# Altium PCB PCB1.PcbDoc
Units mil, origin at the board's own origin, x right, y up, seen from the top; angles counter-clockwise.
Board outline 3705 x 1620 mil, 2 copper layers (Top Layer, Bottom Layer); 43 components, 32 nets, 138 pads, 127 vias.
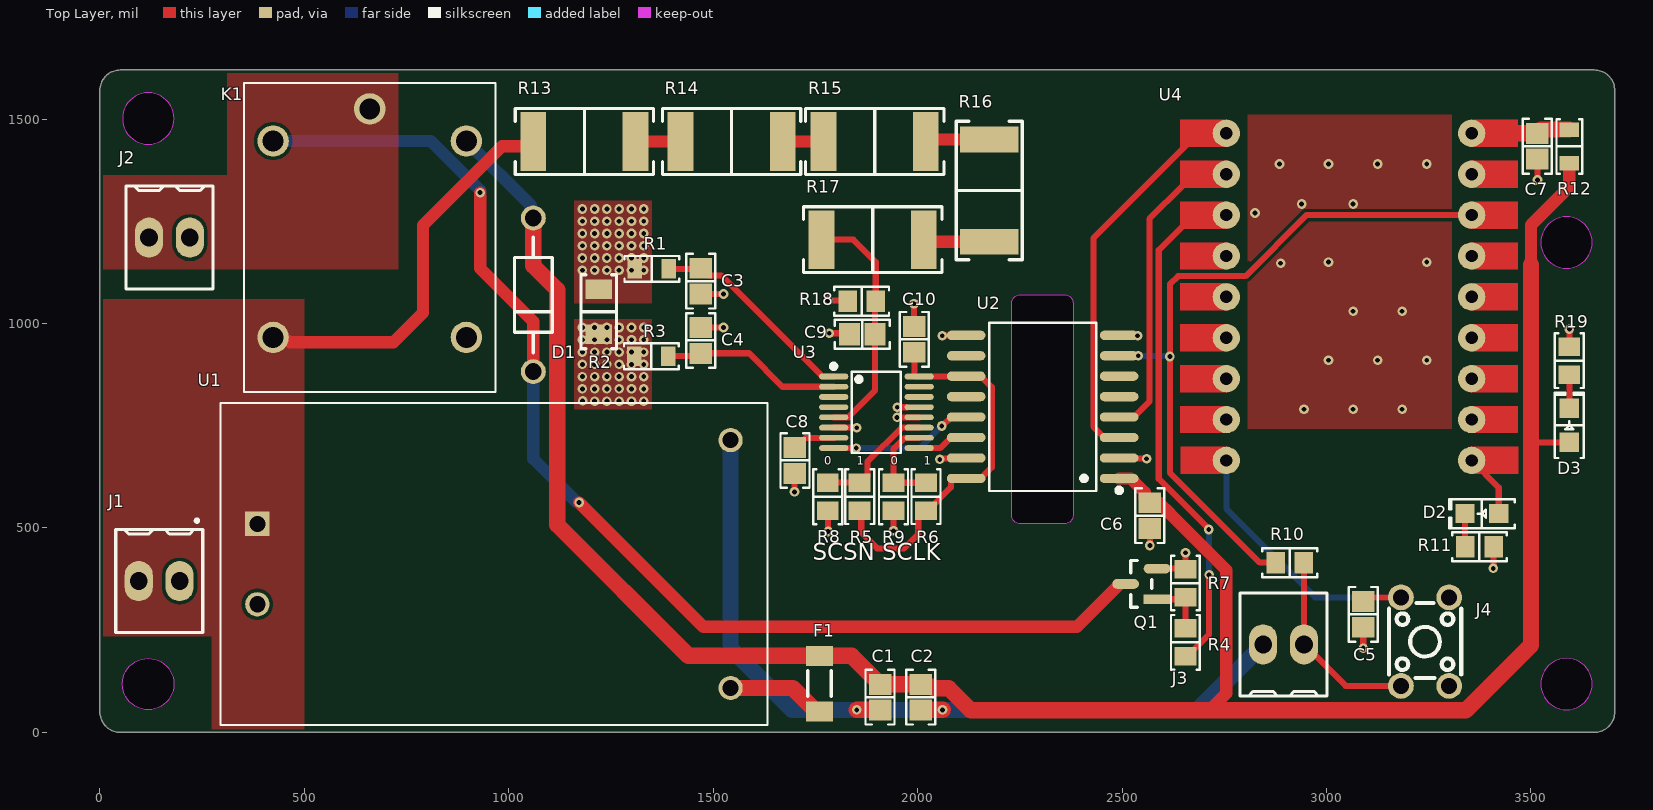
[diagram p0: Top Layer view]
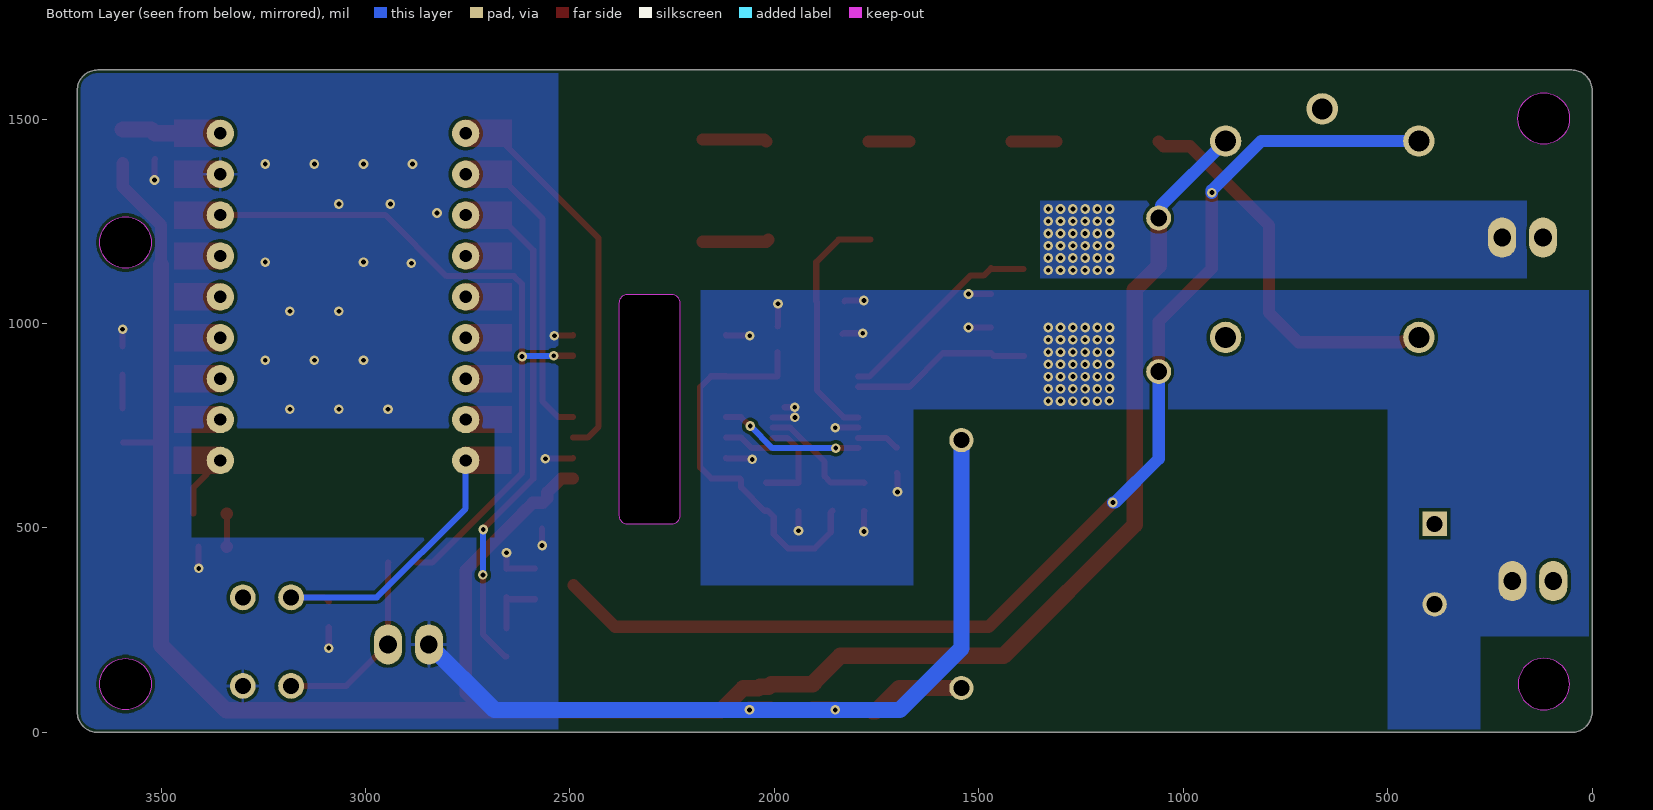
[diagram p1: Bottom Layer view, seen from below]
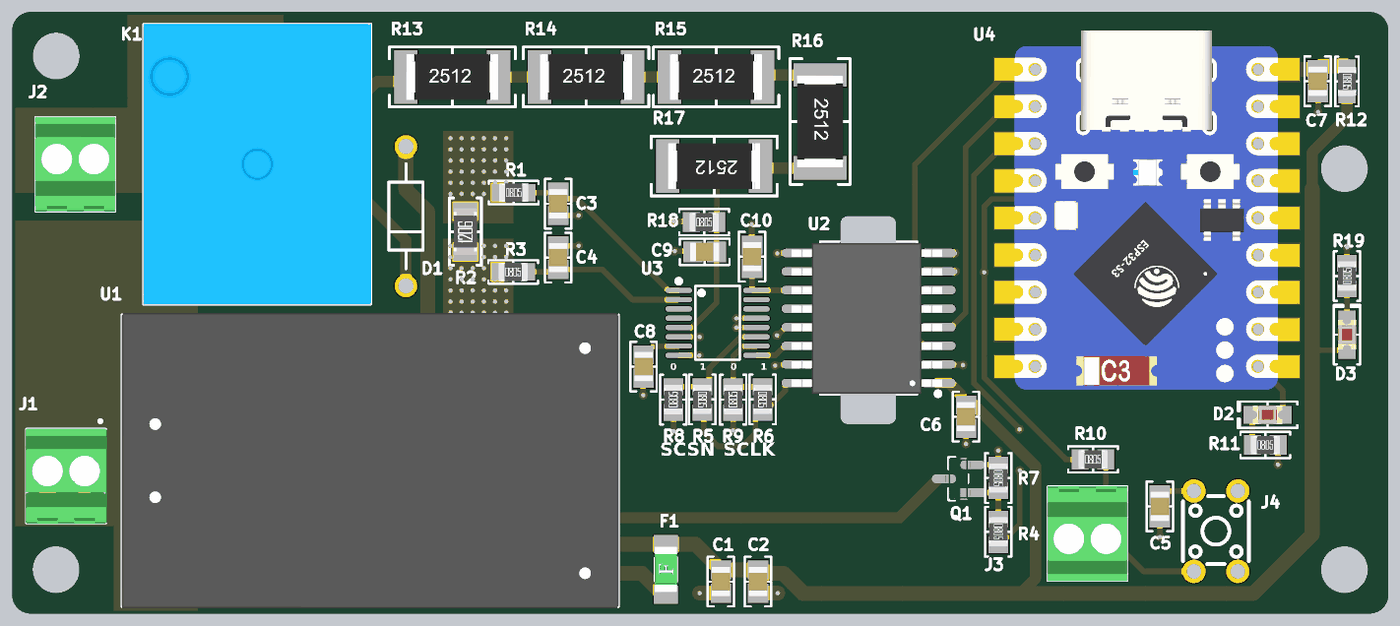
[diagram p2: 3D render of the assembled board from above, using the file's embedded part models]

## Layer stack, top to bottom
Top Solder: solder mask 0.4, Solder Resist, Dk 3.5
Top Layer: signal copper 1.4
Dielectric 1: dielectric 12.6, FR-4, Dk 4.8
Bottom Layer: signal copper 1.4
Bottom Solder: solder mask 0.4, Solder Resist, Dk 3.5

## Board outline
50,0 cw(c50,50) 0,50 0,1570 cw(c50,1570) 50,1620 3655,1620 cw(c3655,1570) 3705,1570 3705,50 cw(c3655,50) 3655,0 115,0
cut-out: 3523.9,1198 ccw(c3586.89,1198) 3586.89,1135.01 ccw(c3586.89,1198) 3649.88,1198 ccw(c3586.89,1198) 3586.89,1260.99 ccw(c3586.89,1198)
cut-out: 118.31,1438.29 ccw(c118.31,1501.28) 181.3,1501.28 ccw(c118.31,1501.28) 118.31,1564.27 ccw(c118.31,1501.28) 55.31,1501.28 ccw(c118.31,1501.28)
cut-out: 2230,530 2230,1050 cw(c2250,1050) 2250,1070 2360,1070 cw(c2360,1050) 2380,1050 2380,530 cw(c2360,530) 2360,510 2250,510 cw(c2250,530)
cut-out: 3523.9,118.11 ccw(c3586.89,118.11) 3586.89,55.12 ccw(c3586.89,118.11) 3649.88,118.11 ccw(c3586.89,118.11) 3586.89,181.1 ccw(c3586.89,118.11)
cut-out: 118.11,55.12 cw(c118.11,118.11) 55.12,118.11 cw(c118.11,118.11) 118.11,181.1 cw(c118.11,118.11) 181.1,118.11 cw(c118.11,118.11)

## Design rules (kind name [scope] priority, off if disabled: settings)
BoardOutlineClearance [All] p1: gap=7.87 ignorepadtopadclearanceinfootprint=FALSE
Clearance [All] p1: gap=8 ignorepadtopadclearanceinfootprint=FALSE except(9.84: Arc-Hole Track-Hole SMDPad-Hole THPad-Hole Via-Hole Fill-Hole Poly-Hole Region-Hole Text-Hole)
ComponentClearance [All] p1: gap=5 collisioncheckmode=3 verticalgap=5 showdistances=TRUE
DiffPairsRouting [All] p1: maxlimit=15 minlimit=8 mostfreqgap=8 toplayer_minwidth=8 toplayer_maxwidth=1000 toplayer_prefwidth=8 bottomlayer_minwidth=8 bottomlayer_maxwidth=1000 bottomlayer_prefwidth=8 maxuncoupledlength=500
Height [All] p1: minheight=0 maxheight=71497.94 prefheight=500
HoleSize [All] p1: absolutevalues=TRUE maxlimit=248.03 minlimit=11.81 maxpercent=80.000 minpercent=20.000
HoleToHoleClearance [All] p1: gap=9.84 allowstackedmicrovias=FALSE
MinimumAnnularRing [All] p1: minimumring=3
MinimumSolderMaskSliver [All] p1: minsoldermaskwidth=0
PlaneClearance [All] p1: clearance=8
PlaneConnect PlaneConnectPowerPads [InPadClass('PowerPads')] p1: planeconnectstyle=Direct reliefexpansion=20 reliefentries=4 reliefconductorwidth=10 reliefairgap=10
PlaneConnect [All] p2: pad.planeconnectstyle=Relief pad.reliefexpansion=11.81 pad.reliefentries=4 pad.reliefconductorwidth=8 pad.reliefairgap=8 via.planeconnectstyle=Direct via.reliefexpansion=11.81 via.reliefentries=4 via.reliefconductorwidth=5 via.reliefairgap=5
PolygonConnect PolygonConnectPowerPads [All vs (InPadClass('PowerPads'))] p1: connectstyle=Direct reliefconductorwidth=10 reliefentries=4 polygonreliefangle="90 Angle" airgapwidth=10
PolygonConnect [All] p2: thpad.connectstyle=Relief thpad.reliefconductorwidth=8 thpad.reliefentries=4 thpad.polygonreliefangle="90 Angle" thpad.airgapwidth=8 smdpad.connectstyle=Relief smdpad.reliefconductorwidth=8 smdpad.reliefentries=4 smdpad.polygonreliefangle="90 Angle" smdpad.airgapwidth=8 via.connectstyle=Direct via.reliefconductorwidth=5 via.reliefentries=4 via.polygonreliefangle="90 Angle" via.airgapwidth=5
RoutingVias [All] p1: holewidth=11.81 width=23.62 viastyle="Through Hole" minholewidth=11.81 minwidth=23.62 maxholewidth=23.62 maxwidth=259.84
SilkToSilkClearance [All] p1: silktosilkclearance=0
SilkToSolderMaskClearance [IsPad] p1: minsilkscreentomaskgap=5 clearancetoexposedcopper=TRUE
SolderMaskExpansion [All] p1: expansion=2.95 istentingtop=FALSE
SupplyNets "Schematic Supply Nets_6" [InNet('3V3')] p1: voltage=0.000
SupplyNets "Schematic Supply Nets_5" [InNet('OUT2')] p2: voltage=0.000
SupplyNets "Schematic Supply Nets_4" [InNet('GND')] p3: voltage=0.000
SupplyNets "Schematic Supply Nets_3" [InNet('+5')] p4: voltage=0.000
SupplyNets "Schematic Supply Nets_2" [InNet('PGND')] p5: voltage=0.000
SupplyNets "Schematic Supply Nets_1" [InNet('AC1')] p6: voltage=0.000
SupplyNets "Schematic Supply Nets" [InNet('OUT1')] p7: voltage=0.000
Width [All] p1: maxlimit=1000 minlimit=8 preferedwidth=8 minimp=50.000000 maximp=50.000000 favimp=50.000000
20 further rules are at their usual default settings.

## Components (designator, comment, footprint, x,y, rotation, side; value= is the part's Value field where it differs from the comment)
C1 "10 µF" "CAP 0805_2012" 1908,86 r270 top
C2 "10 µF" "CAP 0805_2012" 2008,86 r270 top
C3 "0.033 µF" "CAP 0805_2012" 1470,1103.5 r90 top
C4 "0.033 µF" "CAP 0805_2012" 1470,958.5 r90 top
C5 "10 µF" "CAP 0805_2012" 3090,288.5 r270 top
C6 "0.1 µF" "CAP 0805_2012" 2568,530 r270 top
C7 "0.1 µF" "CAP 0805_2012" 3515,1433.5 r270 top
C8 "0.1 µF" "CAP 0805_2012" 1700,665 r90 top
C9 "0.033 µF" "CAP 0805_2012" 1864.5,974 r0 top
C10 "0.1 µF" "CAP 0805_2012" 1992,961 r90 top
D1 "CMP-0902-00115-1" CMP-0902-00115-1 1060,1070 r90 top
D2 "Red" "LED 0805_2012 RED" 3380,535 r180 top
D3 "Red" "LED 0805_2012 RED" 3594,751 r90 top
F1 "04661.25NR" "FUSE 1206_3216 0.6MM" 1760,119 r90 top
J1 "282834-2" "TE 282834-2" 145,370 r0 top
J2 "282834-2" "TE 282834-2" 170,1210 r0 top
J3 "282834-2" "TE 282834-2" 2895,215 r180 top
J4 "Tactile switch" "Tactive switch" 3240.94,221.73 r90 top
K1 "CMP-003-000000-1" CMP-003-000000-1 660,1210 r270 top
Q1 "P2N2222AG" FP-SOT23-IPC_A 2547,363 r180 top
R1 "100 Ohms" "YAGEO RES 0805_2012" 1350,1133.5 r0 top
R2 "1 mOhms" "RES 1206_3216" 1220,1028.5 r90 top
R3 "100 Ohms" "YAGEO RES 0805_2012" 1348.66,920 r0 top
R4 "1 kOhms" "RES 0805_2012" 2655,220 r270 top
R5 "1 kOhms" "RES 0805_2012" 1858,576.45 r270 top
R6 "1 kOhms" "RES 0805_2012" 2020.43,576.44 r270 top
R7 "1 kOhms" "RES 0805_2012" 2655,365 r270 top
R8 "1 kOhms" "RES 0805_2012" 1780,576 r90 top
R9 "1 kOhms" "RES 0805_2012" 1941,576 r90 top
R10 "1 kOhms" "RES 0805_2012" 2910,415 r0 top
R11 "1 kOhms" "RES 0805_2012" 3374,454 r0 top
R12 "100 Ohms" "YAGEO RES 0805_2012" 3594,1433 r270 top
R13 "200 kOhms" "RES 2512_6432" 1185,1445 r0 top
R14 "200 kOhms" "RES 2512_6432" 1545,1445 r0 top
R15 "200 kOhms" "RES 2512_6432" 1895,1445 r0 top
R16 "200 kOhms" "RES 2512_6432" 2175,1325 r270 top
R17 "200 kOhms" "RES 2512_6432" 1890,1205 r180 top
R18 "1 kOhms" "RES 0805_2012" 1863,1054 r0 top
R19 "1 kOhms" "RES 0805_2012" 3594,909 r90 top
U1 "HLK-PM01" HLK-PM01 964.74,411.58 r0 top
U2 "CA-IS3621LVW" CA-IS3621LVW 2305,795 r90 top
U3 "HLW8112" HLW8112 1900,785 r270 top
U4 "ESP32 S3 SuperMini" "ESP32 S3 SUPERMINI" 3409.33,1527.6 r0 top

## Footprints (in the part's own frame and the unit in brackets; to place one, negate y for a bottom-side part, rotate by r counter-clockwise, add the part's x,y. Pads: shape width x height; smd on the part's side, far side on the other; paste and mask are expansions set on the pad)
CA-IS3621LVW [mil]
  oval 22.6x94.51 smd paste+0 mask+2: 1(-173.98,-187.75) 2(-123.98,-187.75) 3(-73.98,-187.75) 4(-23.98,-187.75) 5(26.02,-187.75) 6(76.02,-187.75) 7(126.02,-187.75) 8(176.02,-187.75) 9(176.02,186.29) 10(126.02,186.29) 11(76.02,186.29) 12(26.02,186.29) 13(-23.98,186.29) 14(-73.98,186.29) 15(-123.98,186.29) 16(-173.98,186.29)
  silkscreen extent -209,-194 207,130, body extent -203,-199 203,207, height 104
"CAP 0805_2012" [mm] "Chip Capacitor, 2-Leads, Body 2.00x1.20mm, IPC Medium Density"
  rect 1.3x1.4 smd: 1(-0.8,0) 2(0.8,0)
  silkscreen extent -1.7,-0.9 1.7,0.9, body extent -1,-0.64 1,0.64, height 1.26
CMP-003-000000-1 [mm]
  round 1.95 hole 1.3: COIL1(-6,6) COIL2(-6,-6) COM(-8,0) NC(6.2,6) NO(6.2,-6)
  silkscreen extent -9.6,-7.8 9.6,7.8, body extent -9.6,-7.8 9.6,7.8, height 15.8
CMP-0902-00115-1 [mm]
  round 1.55 hole 1.05: 1(-4.77,0) 2(4.77,0)
  silkscreen extent -3.59,-1.17 3.59,1.17
"ESP32 S3 SUPERMINI" [mm]
  round 1.7 hole 0.762: 1(-16.62,-1.59) 2(-16.62,-4.13) 3(-16.62,-6.67) 4(-16.62,-9.21) 5(-16.62,-11.75) 6(-16.62,-14.29) 7(-16.62,-16.83) 8(-16.62,-19.37) 9(-16.62,-21.91) 10(-1.38,-21.91) 11(-1.38,-19.37) 12(-1.38,-16.83) 13(-1.38,-14.29) 14(-1.38,-11.75) 15(-1.38,-9.21) 16(-1.38,-6.67) 17(-1.38,-4.13) 18(-1.38,-1.59)
  Top Layer region: -1.5,-4.98 1.5,-4.98 1.5,-3.28 -1.5,-3.28
  Top Layer region: -19.5,-2.44 -16.5,-2.44 -16.5,-0.74 -19.5,-0.74
  Top Layer region: -19.5,-4.98 -16.5,-4.98 -16.5,-3.28 -19.5,-3.28
  Top Layer region: -19.5,-7.52 -16.5,-7.52 -16.5,-5.82 -19.5,-5.82
  Top Layer region: -19.5,-10.06 -16.5,-10.06 -16.5,-8.36 -19.5,-8.36
  Top Layer region: -19.5,-12.6 -16.5,-12.6 -16.5,-10.9 -19.5,-10.9
  Top Layer region: -19.5,-15.14 -16.5,-15.14 -16.5,-13.44 -19.5,-13.44
  Top Layer region: -19.5,-17.68 -16.5,-17.68 -16.5,-15.98 -19.5,-15.98
  Top Layer region: -19.5,-20.22 -16.5,-20.22 -16.5,-18.52 -19.5,-18.52
  Top Layer region: -19.473,-22.76 -16.473,-22.76 -16.473,-21.06 -19.473,-21.06
  Top Layer region: -1.5,-2.44 1.5,-2.44 1.5,-0.74 -1.5,-0.74
  Top Layer region: -1.5,-7.52 1.5,-7.52 1.5,-5.82 -1.5,-5.82
  Top Layer region: -1.5,-10.06 1.5,-10.06 1.5,-8.36 -1.5,-8.36
  Top Layer region: -1.5,-12.6 1.5,-12.6 1.5,-10.9 -1.5,-10.9
  Top Layer region: -1.5,-15.14 1.5,-15.14 1.5,-13.44 -1.5,-13.44
  Top Layer region: -1.5,-17.68 1.5,-17.68 1.5,-15.98 -1.5,-15.98
  Top Layer region: -1.5,-20.22 1.5,-20.22 1.5,-18.52 -1.5,-18.52
  Top Layer region: -1.473,-22.76 1.527,-22.76 1.527,-21.06 -1.473,-21.06
  body extent -18.03,-23.48 -0.03,1.07, height 4.91
FP-SOT23-IPC_A [mm]
  rect 1.655x0.602 smd paste+0 mask+0: 1(-0.975,0.95)
  rrect100% 1.655x0.602 smd paste+0 mask+0: 2(-0.975,-0.95) 3(0.975,0)
  silkscreen extent -0.65,-1.45 0.65,1.45, body extent -2.3,-1.95 2.3,1.95, height 0.25
"FUSE 1206_3216 0.6MM" [mm] "Chip Fuse 1.5A AC 63V DC, 2-Leads, Body 3.10x1.55mm, IPC Medium Densitym"
  rect 1.25x1.65 smd: 1(-1.725,0) 2(1.725,0)
  silkscreen extent -0.8,-0.72 0.8,0.72, body extent -1.55,-0.77 1.55,0.78, height 0.76
HLK-PM01 [mm]
  rect 1.508x1.508 / inner round 1.508 / far side rect 1.508x1.508 hole 1: 1(-14.725,2.5)
  round 1.508 hole 1: 2(-14.725,-2.5) 3(14.675,7.7) 4(14.675,-7.7)
  silkscreen extent -18.58,-10 16.97,10, body extent -17.03,-10.1 16.97,10.1, height 15
HLW8112 [mil]
  oval 14x71.4 smd: 1(-85.3,-105.3) 2(-60.3,-105.3) 3(-35.3,-105.3) 4(-10.3,-105.3) 5(14.7,-105.3) 6(39.7,-105.3) 7(64.7,-105.3) 8(89.7,-105.3) 9(89.7,103.8) 10(64.7,103.8) 11(39.7,103.8) 12(14.7,103.8) 13(-10.3,103.8) 14(-35.3,103.8) 15(-60.3,103.8) 16(-85.3,103.8)
  silkscreen extent -116,-111 102,59
"LED 0805_2012 RED" [mm] "Chip Diode, 2-Leads, Body 2.00x1.25mm, IPC Medium Density"
  rect 1.2x1.2 smd: 1(-1.05,0) 2(1.05,0)
  silkscreen extent -2.03,-0.9 2.03,0.9, body extent -1,-0.62 1,0.63, height 0.9
"RES 0805_2012" [mm] "Chip Resistor, 2-Leads, Body 2.00x1.25mm, IPC Medium Density"
  rect 1.15x1.35 smd: 1(-0.875,0) 2(0.875,0)
  silkscreen extent -1.7,-0.9 1.7,0.9, body extent -1,-0.62 1,0.63, height 0.6
"RES 1206_3216" [mm] "Chip Resistor, 2-Leads, Body 3.13x1.55mm, IPC Medium Density"
  rect 1.2x1.65 smd: 1(-1.4,0) 2(1.4,0)
  silkscreen extent -2.3,-1.1 2.3,1.1, body extent -1.6,-0.8 1.6,0.8, height 0.6
"RES 2512_6432" [mm] "Chip Resistor, 2-Leads, Body 6.30x3.15mm, IPC Medium Density"
  rect 1.6x3.65 smd: 1(-3.175,0) 2(3.175,0)
  silkscreen extent -4.3,-2.05 4.3,2.05, body extent -3.15,-1.57 3.15,1.57, height 0.7
"Tactive switch" [mm]
  round 1.6 hole 1: 1(-2.75,1.5) 2(2.75,1.5) 3(-2.75,-1.5) 4(2.75,-1.5)
  silkscreen extent -2.25,-2.25 2.4,2.25
"TE 282834-2" [mm]
  oval 1.75x2.5 hole 1.1: 1(-1.27,0) 2(1.27,0)
  silkscreen extent -2.7,-3.2 2.7,3.2, body extent -2.77,-3.25 2.77,3.25, height 10
"YAGEO RES 0805_2012" [mm] "Chip Resistor, 2-Leads, Body 2.00x1.25mm"
  rect 0.9x1.2 smd: 1(-1.05,0) 2(1.05,0)
  silkscreen extent -1.7,-0.8 1.7,0.8, body extent -1,-0.62 1,0.63, height 0.6

## Part data
C1 C2 C5: library part CL21Y106KPQVPNE, "CAP CER 10UF 10V X7S 0805", Device Package="0805 (2012 Metric)", manufacturer="Samsung Electro-Mechanics", Operating Temperature="-55°C ~ 125°C", Ratings=AEC-Q200, Supplier Part Number 1=1276-6685-1-ND, Temperature Coefficient=X7S, Tolerance=±10%, Voltage - Rated=10V, Applications=Automotive, Capacitance="10 µF", componentlink1description=Datasheet, componentlink1url=http://www.samsungsem.com/kr/support/product-search/mlcc/CL21Y106KPQVPNE.jsp, componentlink2description="DigiKey Link", componentlink2url=https://www.digikey.com/en/products/detail/samsung-electro-mechanics/CL21Y106KPQVPNE/5961169, Features="General Purpose", lastupdated="2026-04-06 7:33:17 PM", Lifecycle Status=Active, Minimum Order=1, Mounting Type="Surface Mount, MLCC, Epoxy", Package / Case="0805 (2012 Metric)", packaging=TapeAndReel, Part Number=CL21Y106KPQVPNE, Part Status=Active, partid=2979, price=0.06, series=CL, Size / Dimension="0.079\" L x 0.049\" W (2.00mm x 1.25mm)", Supplier 1=DigiKey, Thickness (Max)="0.055\" (1.40mm)"
C3 C4 C9: library part C0805C333K5RECAUTO, "CAP CER 0805 33NF 50V X7R 10%", Device Package="0805 (2012 Metric)", manufacturer=KEMET, Operating Temperature="-55°C ~ 125°C", Ratings=AEC-Q200, Supplier Part Number 1=399-C0805C333K5RECAUTOCT-ND, Temperature Coefficient=X7R, Tolerance=±10%, Voltage - Rated=50V, Applications="Automotive, ESD Protection", Capacitance="0.033 µF", componentlink1description=Datasheet, componentlink1url=https://api.kemet.com/component-edge/download/datasheet/C0805C333K5RECAUTO.pdf, componentlink2description="DigiKey Link", componentlink2url=https://www.digikey.com/en/products/detail/kemet/C0805C333K5RECAUTO/8646705, lastupdated="2026-04-06 7:32:00 PM", Lifecycle Status=Active, Minimum Order=1, Mounting Type="Surface Mount, MLCC", Package / Case="0805 (2012 Metric)", packaging=TapeAndReel, Part Number=C0805C333K5RECAUTO, Part Status=Active, partid=32339, price=0.04, series="ESD SMD Auto X7R", Size / Dimension="0.079\" L x 0.049\" W (2.00mm x 1.25mm)", Supplier 1=DigiKey, Thickness (Max)="0.043\" (1.10mm)"
C6 C7 C8 C10: library part CC0805MRX7R9BB104, "CAP CER 0.1UF 50V X7R 0805", Device Package="0805 (2012 Metric)", manufacturer=Yageo, Operating Temperature="-55°C ~ 125°C", Supplier Part Number 1=311-4351-1-ND, Temperature Coefficient=X7R, Tolerance=±20%, Voltage - Rated=50V, Applications="General Purpose", Capacitance="0.1 µF", componentlink1description=Datasheet, componentlink1url=https://www.yageo.com/upload/media/product/productsearch/datasheet/mlcc/UPY-GPHC_X7R_6.3V-to-50V_18.pdf, componentlink2description="DigiKey Link", componentlink2url=https://www.digikey.com/en/products/detail/yageo/CC0805MRX7R9BB104/5884281, lastupdated="2026-04-06 7:33:19 PM", Lifecycle Status=Active, Minimum Order=1, Mounting Type="Surface Mount, MLCC", Package / Case="0805 (2012 Metric)", packaging=TapeAndReel, Part Number=CC0805MRX7R9BB104, Part Status=Active, partid=2475, price=0.01, series=CC, Size / Dimension="0.079\" L x 0.049\" W (2.00mm x 1.25mm)", Supplier 1=DigiKey, Thickness (Max)="0.037\" (0.95mm)"
D2 D3: library part 5990110007F, "LED RED 0805 SMD", Current - Test=20mA, Device Package="0805 (2012 Metric)", Lens Color=0.80mm, manufacturer=Dialight, Millicandela Rating=29mcd, Supplier Device Package=0805, Supplier Part Number 1=350-4353-1-ND, Voltage - Forward (Vf) (Typ)=2.1V, Color=Red, componentlink1description=Datasheet, componentlink1url=http://www.dialightsignalsandcomponents.com/Assets/Brochures_And_Catalogs/Indication/CBI_SMD_new/Dialight_CBI_data_599-0805_Apr2018.pdf, componentlink2description="DigiKey Link", componentlink2url=https://www.digikey.com/en/products/detail/dialight/5990110007F/9385408, Configuration=Standard, Height (Max)=0.80mm, lastupdated="2026-04-05 8:38:27 PM", Lens Size="1.40mm x 1.25mm", Lens Style="Rectangle with Flat Top", Lifecycle Status=Active, Minimum Order=1, Mounting Type="Surface Mount", Package / Case="0805 (2012 Metric)", packaging=TapeAndReel, Part Number=5990110007F, Part Status=Active, partid=308, price=0.04, series=599, Size / Dimension="2.00mm L x 1.25mm W", Supplier 1=DigiKey, Viewing Angle=140°, Wavelength - Dominant=633nm
F1: "FUSE BOARD MOUNT 1.25A 63VAC/VDC", Breaking Capacity @ Rated Voltage=50A, Current Rating (Amps)=1.25A, Device Package="1206 (3216 Metric)", manufacturer="Littelfuse Inc.", Operating Temperature="-55°C ~ 90°C", Supplier Part Number 1=F1465CT-ND, Voltage Rating - AC=63V, Approval Agency="CSA, UL", Approvals="CSA, UL", componentlink1description=Datasheet, componentlink1url=https://www.littelfuse.com/~/media/electronics/datasheets/fuses/littelfuse_fuse_466_datasheet.pdf.pdf, componentlink2description="DigiKey Link", componentlink2url=http://digikey.com/product-detail/en/littelfuse-inc/04661.25NR/F1465CT-ND/521363, Fuse Type="Board Mount (Cartridge Style Excluded)", lastupdated="2020-09-02 1:30:45 AM", Lifecycle Status=Active, Melting I²t=0.064, Minimum Order=1, Mounting Type="Surface Mount", Package / Case="1206 (3216 Metric)", packaging=TapeAndReel, Part Number=04661.25NR, Part Status=Active, price=0.31, Response Time="Fast Blow", series="SlimLine™ 466", Size / Dimension="0.125\" L x 0.060\" W x 0.023\" H (3.18mm x 1.52mm x 0.58mm)", Supplier 1=DigiKey, Voltage Rating - DC=63V
J1 J2 J3: "TERM BLK 2P SIDE ENT 2.54MM PCB", Color=Green, Current=10A, manufacturer="TE Connectivity AMP Connectors", Supplier Part Number 1=A98333-ND, Voltage=150V, componentlink1description=Datasheet, componentlink1url=https://www.te.com/commerce/DocumentDelivery/DDEController?Action=srchrtrv&DocNm=282834&DocType=Customer+Drawing&DocLang=English, componentlink2description="DigiKey Link", componentlink2url=http://digikey.com/product-detail/en/te-connectivity-amp-connectors/282834-2/A98333-ND/1150135, lastupdated="2020-01-15 4:15:38 AM", Lifecycle Status=Active, Mating Orientation="Horizontal with Board", Minimum Order=1, Mounting Type="Through Hole", Number of Levels=1, packaging=Bulk, Part Number=282834-2, Part Status=Active, Pitch="0.100\" (2.54mm)", Positions Per Level=2, price=0.88, series=Buchanan, Supplier 1=DigiKey, Wire Gauge="16-30 AWG", Wire Termination="Screw - Rising Cage Clamp"
R1 R3 R12: library part RC0805FR-07100RL, "RES 100 OHM 1% 1/8W 0805", Device Package="0805 (2012 Metric)", manufacturer=Yageo, Operating Temperature="-55°C ~ 155°C", Power (Watts)="0.125W, 1/8W", Supplier Device Package=0805, Supplier Part Number 1=311-100CRCT-ND, Temperature Coefficient=±100ppm/°C, Tolerance=±1%, componentlink1description=Datasheet, componentlink1url=https://www.yageo.com/upload/media/product/productsearch/datasheet/rchip/PYu-RC_Group_51_RoHS_L_10.pdf, componentlink2description="DigiKey Link", componentlink2url=https://www.digikey.com/en/products/detail/yageo/RC0805FR-07100RL/727543, Composition="Thick Film", Features="Moisture Resistant", Height - Seated (Max)="0.024\" (0.60mm)", lastupdated="2026-04-05 9:17:59 PM", Lifecycle Status=Active, Minimum Order=1, Number of Terminations=2, Package / Case="0805 (2012 Metric)", packaging=TapeAndReel, Part Number=RC0805FR-07100RL, Part Status=Active, partid=47644, price=0.01, Resistance="100 Ohms", series=RC_L, Size / Dimension="0.079\" L x 0.049\" W (2.00mm x 1.25mm)", Supplier 1=DigiKey
R2: library part CRK0612-FZ-R001E, "RES 0.001 OHM 1% 1W 1206", Device Package="1206 (3216 Metric)", LCSC PRT #=C7467246, manufacturer="Bourns Inc.", Operating Temperature="-55°C ~ 170°C", Power (Watts)=1W, Supplier Device Package=0612, Supplier Part Number 1=CRK0612-FZ-R001ECT-ND, Temperature Coefficient=±50ppm/°C, Tolerance=±1%, componentlink1description=Datasheet, componentlink1url=https://www.bourns.com/docs/Product-Datasheets/CRK.pdf, componentlink2description="DigiKey Link", componentlink2url=https://www.digikey.com/en/products/detail/bourns-inc/CRK0612-FZ-R001E/10064045, Composition="Metal Element", Features="Current Sense, Moisture Resistant", Height - Seated (Max)="0.031\" (0.80mm)", lastupdated="2026-04-06 7:59:55 PM", Lifecycle Status=Active, Minimum Order=1, Number of Terminations=2, Package / Case="1206 (3216 Metric)", packaging=TapeAndReel, Part Number=CRK0612-FZ-R001E, Part Status=Active, partid=66263, price=0.15, Resistance="1 mOhms", series=CRK, Size / Dimension="0.067\" L x 0.126\" W (1.70mm x 3.20mm)", Supplier 1=DigiKey
R4 R5 R6 R7 R8 R9 R10 R11 R18 R19: library part 1-2176092-8, "RES SMD 1K OHM 0.1% 1/4W 0805", Device Package="0805 (2012 Metric)", manufacturer="TE Connectivity Passive Product", Operating Temperature="-55°C ~ 155°C", Power (Watts)="0.25W, 1/4W", Supplier Device Package=0805, Supplier Part Number 1=A110543CT-ND, Temperature Coefficient=±25ppm/°C, Tolerance=±0.1%, componentlink1description=Datasheet, componentlink1url=https://www.te.com/commerce/DocumentDelivery/DDEController?Action=srchrtrv&DocNm=1773272&DocType=DS&DocLang=English, componentlink2description="DigiKey Link", componentlink2url=https://www.digikey.com/en/products/detail/te-connectivity-passive-product/1-2176092-8/4034011, Composition="Thin Film", Height - Seated (Max)="0.026\" (0.65mm)", lastupdated="2026-04-05 8:11:23 PM", Lifecycle Status=Active, Minimum Order=1, Number of Terminations=2, Package / Case="0805 (2012 Metric)", packaging=TapeAndReel, Part Number=1-2176092-8, Part Status=Active, partid=28484, price=0.13, Resistance="1 kOhms", series="RP73P, Holsworthy", Size / Dimension="0.079\" L x 0.049\" W (2.00mm x 1.25mm)", Supplier 1=DigiKey
R13 R14 R15 R16 R17: library part RMCF2512FT200K, "RES 200K OHM 1% 1W 2512", Device Package="2512 (6432 Metric)", LCSC PRT #=C2934059, manufacturer="Stackpole Electronics Inc", Operating Temperature="-55°C ~ 155°C", Power (Watts)=1W, Ratings=AEC-Q200, Supplier Device Package=2512, Supplier Part Number 1=RMCF2512FT200KCT-ND, Temperature Coefficient=±100ppm/°C, Tolerance=±1%, componentlink1description=Datasheet, componentlink1url=https://www.seielect.com/catalog/sei-rmcf_rmcp.pdf, componentlink2description="DigiKey Link", componentlink2url=http://digikey.com/product-detail/en/stackpole-electronics-inc/RMCF2512FT200K/RMCF2512FT200KCT-ND/6053387, Composition="Thick Film", Features="Automotive AEC-Q200", Height - Seated (Max)="0.028\" (0.70mm)", lastupdated="2020-09-02 1:26:51 AM", Lifecycle Status=Active, Minimum Order=1, Number of Terminations=2, Package / Case="2512 (6432 Metric)", packaging=TapeAndReel, Part Number=RMCF2512FT200K, Part Status=Active, price=0.04, Resistance="200 kOhms", series=RMCF, Size / Dimension="0.248\" L x 0.126\" W (6.30mm x 3.20mm)", Supplier 1=DigiKey
U2: LCSC PRT #=C20598866
U3: LCSC PRT #=C970140

## Via types
v1: diameter 23.62, hole 11.81, Top Layer to Bottom Layer, tented both sides, 127 vias

## Nets (pads, with @x,y where several pads share a name; then routed paths per layer and width w, separated by ;. In a path a pad name is that pad's centre, name@x,y a point inside that pad or via, vN(x,y) a via of type N, cw(c..) or ccw(c..) an arc to the next point about the centre after c; other vN are vias at no path point)
3V3: R10.1 U2.7 U4.16 | length 1742.5
  Top Layer w15: U2.7@2492.75,921.02 v1(2539.38,921.01) ; v1(2617,919) 2617,635.28 2837.28,415 R10.1 ; v1@2617,920 2617,1095.77 2637.26,1116.04 2802.04,1116.04 2951,1265 U4.16
  Bottom Layer w15: v1(2539.38,921.01) 2540.38,920.01 2615.99,920.01 v1(2617,919)
+5: C1.1 C2.1 C6.1 D1.2 D3.1 F1.2 K1.COIL1 R12.2 U2.1 | length 5699.7
  Top Layer w15: 3500,709 D3.1@3593.34,709
  Top Layer w30: U2.1 2521.3,621.02 2555.44,586.88 2555.44,572.09 C6.1@2566.03,561.5 ; C6.1 2590.68,561.5 2618.56,533.62 2618.56,533.44 2755,397 2755,95 2713.97,53.97 ; 3500,1144 3500,1240.78 3594,1334.78 R12.2
  Top Layer w40: D1.2 1060,1141 1118.51,1082.49 1118.51,508 1439.6,186.91 F1.2 1838.58,186.91 1900.44,125.06 1900.44,123.09 1906.03,117.5 C1.1 C2.1 2013.59,111.91 2035.18,111.91 2038.99,108.09 2075.79,108.09 2129.91,53.97 2713.97,53.97 3340.97,53.97 3500,213 3500,709 3500,1144
  Bottom Layer w30: K1.COIL1 1054.06,1288.38 1054.06,1263.73 D1.2
AC1: J1.1 K1.NO R13.1 U1.1 | length 969.6
  Top Layer w30: K1.NO 432.73,956.96 461.97,956.96 464.74,954.19 717.98,954.19 790,1026.21 790,1240 983.28,1433.28 1048.28,1433.28 R13.1
exInt: C5.1 J4.2 U4.9 | length 730.8
  Top Layer w15: C5.1 3100,330 J4.2
  Bottom Layer w15: U4.9 2755,547 2972,330 J4.2
GND: C1.2 C2.2 C5.2 C6.2 C7.2 J3.2 J4.3 Q1.2 R7.1 R11.2 R19.2 U1.3 U2.2 U2.8 U4.17 | length 2514.1
  Top Layer w15: U2.2 2493.76,670.01 2558.99,670.01 v1(2560,669) ; U2.8 2493.26,970.51 2537.49,970.51 v1(2538,970) ; v1(2568,457) C6.2 ; Q1.2 2654.05,400.4 R7.1 v1(2655,439) ; v1(3090,206) C5.2 ; v1(3408,401) 3408,453.55 R11.2 ; C7.2 3516,1401.01 v1(3516,1351) ; R19.2 v1(3594,986)
  Top Layer w40: v1(1851,55) 1907.5,55 C1.2 ; C2.2 2008.5,55 v1(2061,55)
  Bottom Layer w40: U1.3 1542.48,205.52 1693.5,54.5 2684.5,54.5 J3.2
  other v1: 2945,790 3065,790 3185,790 3005,910 3125,910 3245,910 3065,1030 3185,1030 2887.81,1147.19 3005,1150 3245,1150 2825,1270 2939.19,1292.31 3065,1292.31 2885,1390 3005,1390 3125,1390 3245,1390
IAN: C4.1 R3.2 U3.2 | length 441.4
  Top Layer w15: R3.2 1462.99,920 C4.1 1587.68,927.01 1669.38,845.3 U3.2
IAP: C3.2 R1.2 U3.1 | length 513.6
  Top Layer w15: R1.2 1468.5,1133.5 C3.2 1488.09,1116.91 1520.39,1116.91 1767,870.3 U3.1
Indicator: D2.1 U4.10 | length 157.5
  Top Layer w15: U4.10 3421.34,598.66 D2.1
NetC7_1: C7.1 R12.1 U4.18 | length 242.9
  Top Layer w40: U4.18 C7.1 3524.34,1474.34 R12.1
NetC8_2: C8.2 U3.7 | length 104.6
  Top Layer w15: C8.2 1701.97,696.5 1725.77,720.3 U3.7
NetD1_1: D1.1 K1.COIL2 Q1.3 | length 2910.1
  Top Layer w30: v1(930,1320) 930,1135 1060,1005 D1.1 ; v1(1172,562) 1476,258 2389.15,258 Q1.3@2491.01,359.86
  Bottom Layer w30: K1.COIL2 809.41,1446.22 930,1325.63 v1(930,1320) ; D1.1 1060,669 1167,562 v1(1172,562)
NetD2_2: D2.2 R11.1 | length 81.4
  Top Layer w15: R11.1@3339.11,454.44 D2.2@3339.11,534.56
  Top Layer w30: D2.2 D2.2@3339.11,534.56 ; R11.1@3339.11,454.44 R11.1
NetD3_2: D3.2 R19.1 | length 82.2
  Top Layer w15: D3.2 R19.1
NetF1_1: F1.1 U1.4 | length 241.3
  Top Layer w40: U1.4 1694.79,108.43 1752.13,51.09 F1.1
NetJ3_1: J3.1 J4.1 R10.2 | length 479.2
  Top Layer w15: R10.2 2945,414.45 J3.1 3046.54,113.46 J4.1
NetQ1_1: Q1.1 R4.1 R7.2 | length 147.7
  Top Layer w15: Q1.1 2650.05,325.6 R7.2 R4.1
NetR13_2: R13.2 R14.1 | length 110
  Top Layer w30: R13.2 R14.1
NetR14_2: R14.2 R15.1 | length 100
  Top Layer w30: R14.2 R15.1
NetR15_2: R15.2 R16.1 | length 157.1
  Top Layer w30: R15.2 2025,1450 R16.1
NetR16_2: R16.2 R17.1 | length 162.1
  Top Layer w30: R17.1 2020,1200 R16.2
NetU2_13: U2.13 U3.8 | length 355.6
  Top Layer w15: U3.8 1794.85,695.15 1849.85,695.15 v1(1850,695) ; v1(2059.01,749.3) 2060.02,749.3 2081.74,771.02 U2.13
  Bottom Layer w15: v1(1850,695) 2004.71,695 v1(2059.01,749.3)
NetU2_14: U2.14 U3.9 | length 125.6
  Top Layer w15: U3.9 2054.98,695.3 2080.7,721.02 U2.14
OUT1: J2.1 K1.COM
OUT2: J2.2 R1.1 R2.2
  other v1: 1180,1130 1210,1130 1240,1130 1270,1130 1300,1130 1330,1130 1180,1160 1210,1160 1240,1160 1270,1160 1300,1160 1330,1160 1180,1190 1210,1190 1240,1190 1270,1190 1300,1190 1330,1190 1180,1220 1210,1220 1240,1220 1270,1220 1300,1220 1330,1220 1180,1250 1210,1250 1240,1250 1270,1250 1300,1250 1330,1250 1180,1280 1210,1280 1240,1280 1270,1280 1300,1280 1330,1280
PGND: C3.1 C4.2 C8.1 C9.1 C10.2 J1.2 R2.1 R3.1 R8.1 R9.1 R18.1 U1.2 U2.9 U2.15 U3.6 U3.12 U3.13 | length 671
  Top Layer w15: C4.2 v1(1525,990) ; C3.1 v1(1525,1072) ; v1(1699,588) 1699,632.5 C8.1 ; R8.1 1781,540.55 v1(1781,491) ; v1(1781,1056) 1826.55,1056 R18.1 ; v1(1784,976) 1831,976 C9.1 ; U3.6 1851,745.3 v1(1851,745) ; v1(1941,493) R9.1 ; v1(1949.85,770.34) U3.12 ; v1(1950,795) U3.13@1975.6,795 ; v1(1991,1048) 1991,993.5 C10.2 ; v1(2054,667.6) 2056.33,667.6 2058.3,669.57 2117.26,669.57 U2.15 ; v1(2060,970) 2060.51,970.51 2118.2,970.51 U2.9
  other v1: 1210,810 1240,810 1270,810 1300,810 1330,810 1180.72,810.72 1180,840 1210,840 1240,840 1270,840 1300,840 1330,840 1180,870 1210,870 1240,870 1270,870 1300,870 1330,870 1180,900 1210,900 1240,900 1270,900 1300,900 1330,900 1180,930 1210,930 1240,930 1270,930 1300,930 1330,930 1180,960 1210,960 1240,960 1270,960 1300,960 1330,960 1180,990 1210,990 1240,990 1270,990 1300,990 1330,990
Relay: R4.2 U4.3 | length 1274.7
  Top Layer w15: R4.2 2658.94,185.55 2713,239.61 v1(2713,385) ; v1(2712,496) 2712,497.43 2589.69,619.74 2589.69,1179.61 2665.14,1255.06 2738.94,1255.06 2742,1252 U4.3
  Bottom Layer w15: v1(2712,496) 2712.5,495.5 2712.5,385.5 v1(2713,385)
RX: U2.4 U4.2 | length 770.5
  Top Layer w15: U2.4 2528.7,771.02 2566.69,809.01 2566.69,1255.69 2649.11,1338.11 2649.11,1339.04 2675.08,1365 U4.2
SCLK: R6.1 R9.2 U3.10 | length 236.3
  Top Layer w15: U3.10 1968.28,720.3 1941,693.02 R9.2 2019.99,610.45 R6.1
SCSN: R5.1 R8.2 U3.11 | length 296.6
  Top Layer w15: R8.2 1780.45,610.9 R5.1 ; R5.1@1861.94,610.9 1877.07,626.04 1877.07,661.62 1960.75,745.3 U3.11
TX: U2.3 U4.1 | length 965.9
  Top Layer w15: U2.3 2456.79,721.02 2429.99,747.82 2429.99,1208.76 2686.23,1465 U4.1
VISO: C10.1 R5.2 R6.2 U2.11 U2.16 U3.16 | length 963.2
  Top Layer w15: R5.2 1861.94,538.06 1861.94,489 1900.94,450 1967,450 2001.36,484.36 2001.36,526.85 2016.49,541.99 2024.37,541.99 2081.3,598.92 2081.3,617.51 2084.81,621.02 U2.16 2154.66,621.02 2181.46,647.82 2181.46,844.22 2154.66,871.02 U2.11 ; C10.1 1992,870.8 1992.5,870.3 U3.16 U2.11@2117.99,870.3
VP: C9.2 R17.2 R18.2 U3.5 | length 598.4
  Top Layer w15: R17.2 1842.6,1205 1897.45,1150.15 R18.2 1895.99,1052.54 C9.2 1895.99,836.07 1830.22,770.3 U3.5
pads on no net: J4.4 K1.NC U2.5 U2.6 U2.10 U2.12 U3.3 U3.4 U3.14 U3.15 U4.4 U4.5 U4.6 U4.7 U4.8 U4.11 U4.12 U4.13 U4.14 U4.15

## Polygon pours and split planes (outlines as drawn)
GND on Bottom Layer "GND_L02_P007" (solid, pour order 7): 2528,1632 2528,-39 3751,-39 3751,1632
PGND on Bottom Layer "PGND_L02_P000" (solid, pour order 0): -10,-20 -10,1081 2180,1081 2180,790 500,790 500,-20
PGND on Bottom Layer "PGND_L02_P006" (solid, pour order 6): 1660,800 1660,360 2180,360 2180,800
OUT2 on Bottom Layer "OUT2_L02_P003" (solid, pour order 3): 160,1300 160,1110 500,1110 1350,1110 1350,1300
GND on Top Layer "GND_L01_P010" (solid, pour order 10): 2807,1511 2807,742 3306,742 3306,1511
AC1 on Top Layer "AC1_L01_P002" (solid, pour order 2): -10,-20 -10,1059 500,1059 500,790 500,-20
OUT1 on Top Layer "OUT1_L01_P001" (solid, pour order 1): -10,1650 -10,1133 730,1133 730,1650
PGND on Top Layer "PGND_L01_P005" (solid, pour order 5): 1160,1010 1160,790 1350,790 1350,1010
OUT2 on Top Layer "OUT2_L01_P004" (solid, pour order 4): 1160,1050 1160,1300 1350,1300 1350,1050

## Other copper
Top Layer:
  pour cut-out: -53.41,235.35 273.59,235.35 273.59,-58.65 -55.41,-58.65
  pour cut-out: -16,1656 311,1656 311,1362 -18,1362
Bottom Layer:
  pour cut-out: 2684.5,742 2684.5,477 3425.5,477 3425.5,742
  pour cut-out: -53,235 274,235 274,-59 -55,-59

## Silkscreen, mask and mechanical layers (free items; w line width, h text height)
Top Overlay:
  text "0" at 1772.03,647.67 h35
  text "1" at 1851.03,647.55 h35
  text "0" at 1934.03,647.67 h35
  text "1" at 2015.03,647.55 h35
  text "SCSN" at 1744,407.54 h70
  text "SCLK" at 1914,407.54 h70
Mechanical 6:
  circle w10: c3586.89,1198 r62.99
  circle w10: c118.11,118.11 r62.99
  circle w10: c118.11,1501.89 r62.99
  circle w10: c3586.89,118.11 r62.99
  pour cut-out: 3523.9,1198 ccw(c3586.89,1198) 3586.89,1135.01 ccw(c3586.89,1198) 3649.88,1198 ccw(c3586.89,1198) 3586.89,1260.99 ccw(c3586.89,1198)
  pour cut-out: 3523.9,118.11 ccw(c3586.89,118.11) 3586.89,55.12 ccw(c3586.89,118.11) 3649.88,118.11 ccw(c3586.89,118.11) 3586.89,181.1 ccw(c3586.89,118.11)
  pour cut-out: 118.11,1438.9 cw(c118.11,1501.89) 55.12,1501.89 cw(c118.11,1501.89) 118.11,1564.88 cw(c118.11,1501.89) 181.1,1501.89 cw(c118.11,1501.89)
  pour cut-out: 118.11,55.12 cw(c118.11,118.11) 55.12,118.11 cw(c118.11,118.11) 118.11,181.1 cw(c118.11,118.11) 181.1,118.11 cw(c118.11,118.11)
  lines w10: 0,50 ccw(c50,50) 50,0 115,0 3655,0 ccw(c3655,50) 3705,50 3705,1570 ccw(c3655,1570) 3655,1620 80,1620 50,1620 ccw(c50,1570) 0,1570 0,50 ; 2230,530 ccw(c2250,530) 2250,510 2360,510 ccw(c2360,530) 2380,530 2380,1050 ccw(c2360,1050) 2360,1070 2250,1070 ccw(c2250,1050) 2230,1050 2230,530